# EAGLE board leer (EAGLE 6.4)
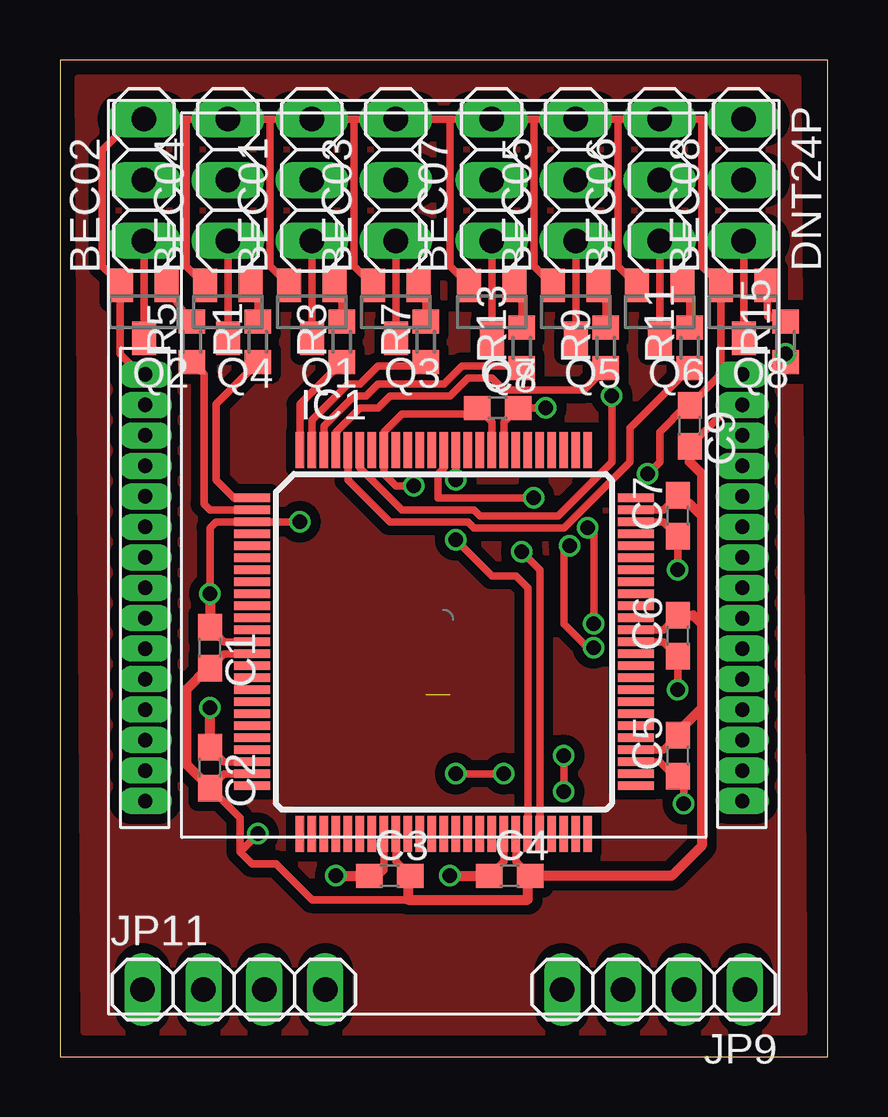
[diagram p0: board, top side]
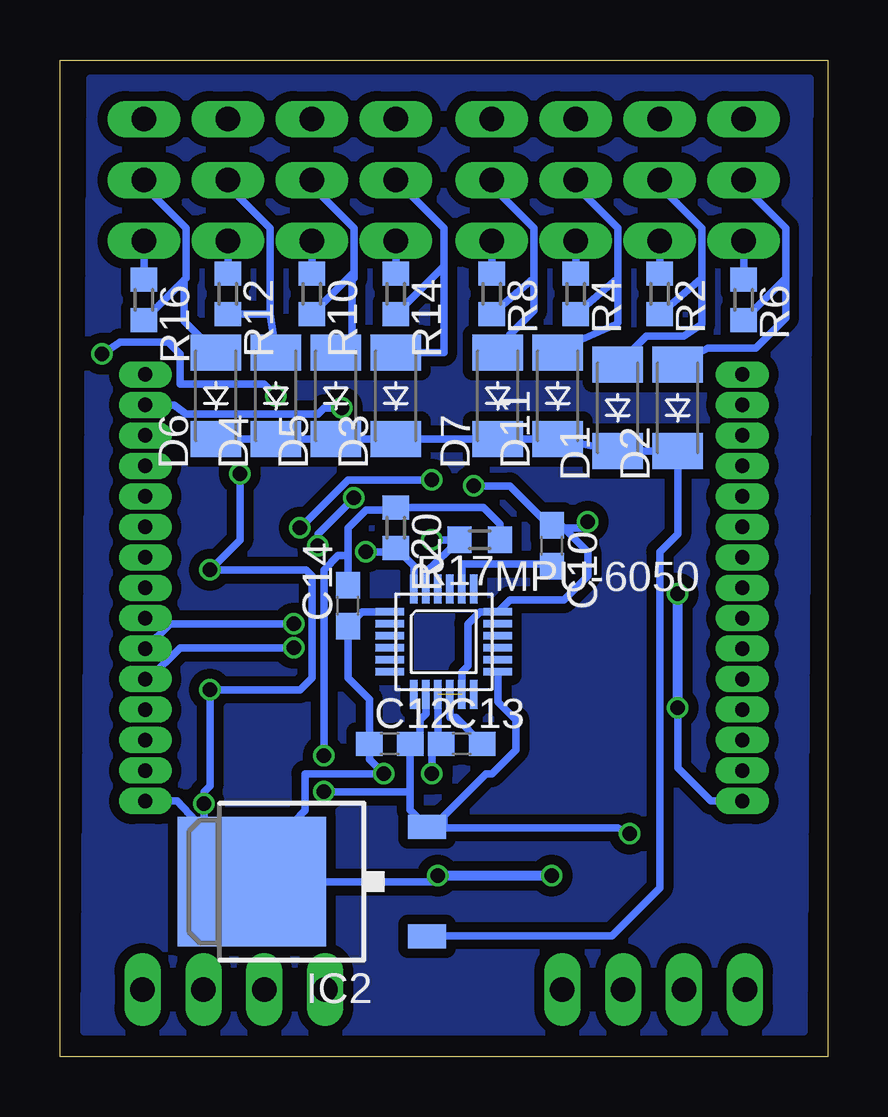
[diagram p1: board, bottom side, seen from below]

Size 32 x 41.55 mm. Coordinates in mm from the lower left corner, seen from the top.
Outline: 32,41.55 0,41.55 0,0 32,0 32,41.55
Copper layers (1*16): Top 0.035mm / dielectric 1.5mm / Bottom 0.035mm
Design rules "ITEADstudio_DRC": minimum track width 6mil, minimum drill 12mil, track to track 6mil, track to pad 6mil, pad to pad 6mil, via to via 6mil, smd to smd 0mil, copper to edge 10mil, drill to drill 10mil, minimum pad ring 10mil, minimum via ring 6mil, stop-mask expansion 2mil, vias tented up to drill 100mil, thermal gap 10mil

## Footprints (pad centres in the part's own frame; a part is rotated, then mirrored left to right if it is on the bottom)
1X03 = drill 1.016 long: 1 -2.54,0; 2 0,0; 3 2.54,0
C0603 = smd 1.1 x 1: 1 -0.85,0; 2 0.85,0
SOD-123_MINI-SMA = smd 1.5 x 2.1: A 1.8,0; C -1.8,0
TQFP100 = smd 1.5 x 0.35: 1 -8,6; 2 -8,5.5; 3 -8,5; 4 -8,4.5; 5 -8,4; 6 -8,3.5; 7 -8,3; 8 -8,2.5; 9 -8,2; 10 -8,1.5; 11 -8,1; 12 -8,0.5; 13 -8,0; 14 -8,-0.5; 15 -8,-1; 16 -8,-1.5; 17 -8,-2; 18 -8,-2.5; 19 -8,-3; 20 -8,-3.5; 21 -8,-4; 22 -8,-4.5; 23 -8,-5; 24 -8,-5.5; 25 -8,-6; 51 8,-6; 52 8,-5.5; 53 8,-5; 54 8,-4.5; 55 8,-4; 56 8,-3.5; 57 8,-3; 58 8,-2.5; 59 8,-2; 60 8,-1.5; 61 8,-1; 62 8,-0.5; 63 8,0; 64 8,0.5; 65 8,1; 66 8,1.5; 67 8,2; 68 8,2.5; 69 8,3; 70 8,3.5; 71 8,4; 72 8,4.5; 73 8,5; 74 8,5.5; 75 8,6 | smd 0.35 x 1.5: 26 -6,-8; 27 -5.5,-8; 28 -5,-8; 29 -4.5,-8; 30 -4,-8; 31 -3.5,-8; 32 -3,-8; 33 -2.5,-8; 34 -2,-8; 35 -1.5,-8; 36 -1,-8; 37 -0.5,-8; 38 0,-8; 39 0.5,-8; 40 1,-8; 41 1.5,-8; 42 2,-8; 43 2.5,-8; 44 3,-8; 45 3.5,-8; 46 4,-8; 47 4.5,-8; 48 5,-8; 49 5.5,-8; 50 6,-8; 76 6,8; 77 5.5,8; 78 5,8; 79 4.5,8; 80 4,8; 81 3.5,8; 82 3,8; 83 2.5,8; 84 2,8; 85 1.5,8; 86 1,8; 87 0.5,8; 88 0,8; 89 -0.5,8; 90 -1,8; 91 -1.5,8; 92 -2,8; 93 -2.5,8; 94 -3,8; 95 -3.5,8; 96 -4,8; 97 -4.5,8; 98 -5,8; 99 -5.5,8; 100 -6,8
TO252 = smd 1 x 1.6: 1 -2.28,-4.8; 2 2.28,-4.8 | smd 5.4 x 6.2: 3 0,2.5
1X04 = drill 1.016 long: 1 -3.81,0; 2 -1.27,0; 3 1.27,0; 4 3.81,0
SOT23 = smd 1 x 1.4: 1 -0.95,-1.1; 2 0.95,-1.1; 3 0,1.1
R0603 = smd 1 x 1.1: 1 -0.85,0; 2 0.85,0
DNT24P_RADIO_MODULE = drill 0.6 pad 0.889 long: P1 8.89,12.446; P2 7.62,12.446; P3 6.35,12.446; P4 5.08,12.446; P5 3.81,12.446; P6 2.54,12.446; P7 1.27,12.446; P8 0,12.446; P9 -1.27,12.446; P10 -2.54,12.446; P11 -3.81,12.446; P12 -5.08,12.446; P13 -6.35,12.446; P14 -7.62,12.446; P15 -8.89,12.446; P16 -8.89,-12.446; P17 -7.62,-12.446; P18 -6.35,-12.446; P19 -5.08,-12.446; P20 -3.81,-12.446; P21 -2.54,-12.446; P22 -1.27,-12.446; P23 0,-12.446; P24 1.27,-12.446; P25 2.54,-12.446; P26 3.81,-12.446; P27 5.08,-12.446; P28 6.35,-12.446; P29 7.62,-12.446; P30 8.89,-12.446
MPU-6050_ACC_GYRO = smd 1.2 x 0.3: P1 -2.25,1.25; P2 -2.25,0.75; P3 -2.25,0.25; P4 -2.25,-0.25; P5 -2.25,-0.75; P6 -2.25,-1.25; P13 2.25,-1.25; P14 2.25,-0.75; P15 2.25,-0.25; P16 2.25,0.25; P17 2.25,0.75; P18 2.25,1.25 | smd 0.3 x 1.2: P7 -1.25,-2.2; P8 -0.75,-2.2; P9 -0.25,-2.2; P10 0.25,-2.2; P11 0.75,-2.2; P12 1.25,-2.2; P19 1.25,2.2; P20 0.75,2.2; P21 0.25,2.2; P22 -0.25,2.2; P23 -0.75,2.2; P24 -1.25,2.2

## Placement (x,y rotation side)
BEC01  PCM  [1X03]  10.5,36.55 90 top
BEC02  PCM  [1X03]  3.5,36.55 90 top
BEC03  PCM  [1X03]  14,36.55 90 top
BEC04  PCM  [1X03]  7,36.55 90 top
BEC05  PCM  [1X03]  21.5,36.55 90 top
BEC06  PCM  [1X03]  25,36.55 90 top
BEC07  PCM  [1X03]  18,36.55 90 top
BEC08  PCM  [1X03]  28.5,36.55 90 top
C1  [C0603]  6.25,17.05 270 top
C2  [C0603]  6.25,12.05 270 top
C3  [C0603]  13.75,7.55 0 top
C4  [C0603]  18.75,7.55 0 top
C5  [C0603]  25.75,12.55 90 top
C6  [C0603]  25.75,17.55 90 top
C7  [C0603]  25.75,22.55 90 top
C8  [C0603]  18.25,27.05 0 top
C9  [C0603]  26.25,26.3 270 top
C10  [C0603]  11.5,21.3 270 bottom
C12  [C0603]  18.25,13.05 0 bottom
C13  [C0603]  15.25,13.05 0 bottom
C14  [C0603]  20,18.8 90 bottom
D1  B 140 F  [SOD-123_MINI-SMA]  8.75,27.05 90 bottom
D2  B 140 F  [SOD-123_MINI-SMA]  6.25,27.05 90 bottom
D3  B 140 F  [SOD-123_MINI-SMA]  18,27.55 90 bottom
D4  B 140 F  [SOD-123_MINI-SMA]  23,27.55 90 bottom
D5  B 140 F  [SOD-123_MINI-SMA]  20.5,27.55 90 bottom
D6  B 140 F  [SOD-123_MINI-SMA]  25.5,27.55 90 bottom
D7  B 140 F  [SOD-123_MINI-SMA]  13.75,27.55 90 bottom
D11  B 140 F  [SOD-123_MINI-SMA]  11.25,27.55 90 bottom
IC1  XMEGA128A1  [TQFP100]  16,17.3 0 top
IC2  7805DT  [TO252]  21.5,7.3 90 bottom
JP9  [1X04]  24.75,2.8 180 top
JP11  [1X04]  7.25,2.8 0 top
Q1  BC846BSMD  [SOT23]  10.5,31.05 180 top
Q2  BC846BSMD  [SOT23]  3.5,31.05 180 top
Q3  BC846BSMD  [SOT23]  14,31.05 180 top
Q4  BC846BSMD  [SOT23]  7,31.05 180 top
Q5  BC846BSMD  [SOT23]  21.5,31.05 180 top
Q6  BC846BSMD  [SOT23]  25,31.05 180 top
Q7  BC846BSMD  [SOT23]  18,31.05 180 top
Q8  BC846BSMD  [SOT23]  28.5,31.05 180 top
R1  [R0603]  8.25,29.8 90 top
R2  [R0603]  7,31.8 270 bottom
R3  [R0603]  11.75,29.8 90 top
R4  [R0603]  10.5,31.8 270 bottom
R5  [R0603]  5.5,29.8 90 top
R6  [R0603]  3.5,31.55 270 bottom
R7  [R0603]  15.25,29.8 90 top
R8  [R0603]  14,31.8 270 bottom
R9  [R0603]  22.75,29.55 90 top
R10  [R0603]  21.5,31.8 270 bottom
R11  [R0603]  26.25,29.55 90 top
R12  [R0603]  25,31.8 270 bottom
R13  [R0603]  19.25,29.55 90 top
R14  [R0603]  18,31.8 270 bottom
R15  [R0603]  30.25,29.8 90 top
R16  [R0603]  28.5,31.55 270 bottom
R17  [R0603]  14.5,21.55 180 bottom
R20  [R0603]  18,22.05 270 bottom
U$1  DNT24P_RADIO_MODULE  [DNT24P_RADIO_MODULE]  16,19.55 270 top
U$3  MPU-6050_ACC_GYRO  [MPU-6050_ACC_GYRO]  16,17.3 0 bottom

## Library data of the parts
BEC01-BEC08 JP9 JP11 = pinhead
C1-C10 C12-C14 = eagle-ltspice; SPICEMODEL: NONE; SPICEPREFIX: C
D1-D7 D11 = diode
IC1 = atmel; OC_FARNELL: unknown; OC_NEWARK: unknown
IC2 = linear
Q1-Q8 = transistor-npn
R1-R17 R20 = eagle-ltspice; SPICEMODEL: NONE; SPICEPREFIX: R
U$1 U$3 = USER PARTS

## Nets
+3V3: C1.2 C2.2 C3.2 C4.2 C5.2 C6.2 C7.2 C8.2 C9.2 C12.2 C14.2 IC1.14 IC1.24 IC1.34 IC1.44 IC1.54 IC1.64 IC1.74 IC1.83 IC2.2 R17.1 R20.1 U$1.P14 U$3.P8 U$3.P13
AVCC: IC1.4
AVCC1: IC1.94
GND: BEC01.3 BEC02.3 BEC03.3 BEC04.3 BEC05.3 BEC06.3 BEC07.3 BEC08.3 C1.1 C2.1 C3.1 C4.1 C5.1 C6.1 C7.1 C8.1 C9.1 C10.1 C12.1 C13.1 C14.1 IC1.3 IC1.13 IC1.23 IC1.33 IC1.43 IC1.53 IC1.63 IC1.73 IC1.84 IC1.93 IC2.3 Q1.2 Q2.2 Q3.2 Q4.2 Q5.2 Q6.2 Q7.2 Q8.2 U$1.P1 U$1.P15 U$1.P16 U$1.P30 U$3.P1 U$3.P9 U$3.P11 U$3.P18
N$1: Q4.1 R1.2
N$2: BEC01.1 Q1.3 R4.1
N$3: BEC01.2 D11.A R4.2
N$4: Q1.1 R3.2
N$5: BEC02.1 Q2.3 R6.1
N$6: BEC02.2 D2.A R6.2
N$7: Q2.1 R5.2
N$8: BEC03.1 Q3.3 R8.1
N$9: BEC03.2 D7.A R8.2
N$10: Q3.1 R7.2
N$11: BEC05.1 Q5.3 R10.1
N$12: BEC05.2 D5.A R10.2
N$13: Q5.1 R9.2
N$14: BEC04.1 Q4.3 R2.1
N$15: BEC04.2 D1.A R2.2
N$16: BEC06.1 Q6.3 R12.1
N$17: BEC06.2 D4.A R12.2
N$18: Q6.1 R11.2
N$19: BEC07.1 Q7.3 R14.1
N$20: BEC07.2 D3.A R14.2
N$21: Q7.1 R13.2
N$22: BEC08.1 Q8.3 R16.1
N$23: BEC08.2 D6.A R16.2
N$24: Q8.1 R15.2
N$25: IC1.1 R1.1
N$26: IC1.100 R3.1
N$27: IC1.97 R9.1
N$28: IC1.96 R11.1
N$29: IC1.2 R5.1
N$30: IC1.98 R13.1
N$31: IC1.99 R7.1
N$32: IC1.95 R15.1
N$33: IC1.88 U$1.P5
N$34: D1.C D2.C D3.C D4.C D5.C D6.C D7.C D11.C IC2.1
N$35: C10.2 U$3.P20
N$36: IC1.87 U$1.P6
N$37: C13.2 U$3.P10
PF0: IC1.46 R20.2 U$3.P24
PF1: IC1.45 R17.2 U$3.P23

## Tracks (layer width: path | path; a pad name or v marks a point on that pad's centre or on a via)
+3V3  (via drill 0.6)
  Top 0.305: IC1.83 18.5,26.45 C8.2 v20.25,27.05 | C7.2 25.15,22.8 IC1.74 | C6.2 25.15,17.8 IC1.64 | C5.2 25.15,12.8 IC1.54 | C4.2 19,8.15 IC1.44 | C3.2 14,8.15 IC1.34 | IC1.24 6.85,11.8 C2.2 7.5,9.95 7.5,8.55 | C1.2 6.85,16.8 IC1.14 | C9.2 27.97,27.17 U$1.P14 | v8.25,9.3 7.5,8.55 | 7.5,8.55 8,8.05 9,8.05 10.5,6.55 14.5,6.55 | v21,12.55 v21,11.05
  Top 0.406: C3.2 14.5,7.55 14.5,6.55 19.5,6.55 19.5,7.45 C4.2 25.5,7.55 26.75,8.8 26.75,14.55 | C5.2 25.75,13.55 26.75,14.55 | C6.2 26.4,18.4 26.75,18.05 | 26.75,18.05 26.75,14.55 | C7.2 25.75,23.3 26,23.05 26.25,23.05 26.62,22.68 | 26.62,22.68 26.75,22.55 26.75,18.05 | C9.2 26.25,24.8 26.75,24.3 26.75,22.8 26.62,22.68 | C1.2 6.15,16.2 5.25,15.3 5.25,12.2 C2.2
  Bottom 0.305: IC2.2 16.47,9.58 | v8.25,9.3 8.75,9.55 16,9.55 | 16,9.55 16.67,9.55 IC2.2 | U$3.P8 16.75,14.3 17,14.05 17,13.45 C12.2 17.4,11.05 | R17.1 13.65,22.2 14.35,22.9 R20.1 18.1,22.8 19.25,22.8 20,22.05 20,20.9 | C14.2 20,20.9 | 17.4,11.05 17.4,10.28 IC2.2 | 20,20.9 20.4,20.9 21,20.3 v21,12.55 | v21,11.05 17.4,11.05 | U$3.P13 13.75,14.8 13,14.05 13,12.8 14,11.8 14.25,11.8 16,10.05 16,9.55 | v20.25,27.05 21,27.05 21.25,26.8 26.75,26.8 27.25,27.17 U$1.P14
GND  (via drill 0.6)  (1 unrouted)
  Top 0.305: 5.25,39.09 BEC02.3 3.04,39.09 1.75,37.8 1.75,32.95 Q2.2 2.5,32.1 2.5,29.3 3.36,28.44 U$1.P16 | 5.25,39.09 BEC04.3 8.75,39.09 | 8.75,39.09 BEC01.3 12.25,39.09 | 12.25,39.09 BEC03.3 16.21,39.09 16.25,39.05 | BEC08.3 26.75,39.09 | 26.75,39.09 BEC06.3 23.25,39.09 | 23.25,39.09 BEC05.3 19.75,39.09 | 19.75,39.09 BEC07.3 16.29,39.09 16.25,39.05 | Q4.2 5.25,32.95 5.25,39.09 | Q1.2 8.75,32.95 8.75,39.09 | Q3.2 12.25,32.95 12.25,39.09 | Q7.2 16.25,32.95 16.25,39.05 | Q5.2 19.75,32.95 19.75,39.09 | Q6.2 23.25,32.95 23.25,39.09 | 26.75,39.09 26.75,32.95 Q8.2 27.55,28.45 27.54,28.44 | C8.1 18,26.45 IC1.84 | IC1.73 25.15,22.3 C7.1 v25.75,20.3 | IC1.63 25.15,17.3 C6.1 v25.75,15.3 | C5.1 26,11.45 26,11.3 | 26,11.3 25,12.3 IC1.53 | C4.1 18.5,8.15 IC1.43 | C3.1 13,7.45 13,7.3 13.5,7.8 IC1.33 | C2.1 6.85,12.3 IC1.23 | C1.1 6.85,17.3 IC1.13 | 27.54,28.44 C9.1 26.1,27.15 25,26.05 25,24.8 v24.5,24.3 | 27.54,28.44 U$1.P15 | C8.1 17.05,27.4 | C8.1 17.15,26.8 14.25,26.8 13.5,26.05 IC1.93 13.5,24.3 14,23.8 v14.75,23.8 | v6.25,19.3 6.25,22.05 6.5,22.3 IC1.3 v10,22.3 | 26,11.3 v26,10.55 | v18.5,11.8 v16.5,11.8
  Top 0.406: C2.1 v6.25,14.55 | v6.25,19.3 C1.1 | v16.25,7.55 C4.1 | v11.5,7.55 C3.1
  Bottom 0.305: U$1.P1 27.11,10.66 25.8,9.24 | 25.8,9.24 IC2.3 | v26,10.55 26,9.55 24.37,7.72 | 24.37,7.72 IC2.3 | 25.8,9.24 26,9.44 26,11.05 25.75,11.3 v25.75,15.3 22,15.3 21.5,15.8 21.5,20.05 21.75,20.3 v25.75,20.3 24.5,21.55 v24.5,24.3 | U$1.P30 4.86,10.66 6.25,12.05 6.25,15.05 | v14.75,23.8 13.25,23.8 11.6,22.15 C10.1 11.1,22.15 11,22.05 | v10,22.3 10.25,22.05 11,22.05 | IC2.3 16.5,7.3 v16.25,7.55 | U$3.P1 19.4,18.55 C14.1 20,15.8 19.1,14.9 C12.1 19.1,12.4 v18.5,11.8 21.79,11.8 21.79,10.26 22.25,9.8 24.37,7.72 | v16.5,11.8 16.5,12.65 C13.1 16.25,13.2 U$3.P9 | 11,22.05 10,21.05 10,20.05 11,19.05 13.25,19.05 U$3.P18 14.5,18.55 15,18.05 15,16.3 15.25,16.05 U$3.P11
  Bottom 0.406: v6.25,14.55 6.25,15.05 v6.25,19.3 | v11.5,7.55 v16.25,7.55
GNDS
  pour Bottom (isolate 0.406): 0.75,40.8 30.75,40.8 31,1.05 1,1.05
  pour Top (isolate 0.406): 0.75,40.8 30.75,40.8 31,1.05 1,1.05
N$1
  Top 0.305: R1.2 8.25,31.85 Q4.1
N$2
  Top 0.305: Q1.3 BEC01.1
  Bottom 0.305: R4.1 BEC01.1
N$3
  Bottom 0.305: R4.2 8.75,32.45 | 8.75,32.45 8.75,34.55 10.5,36.3 BEC01.2 | D11.A 10.5,29.8 8.8,30.55 8.75,30.6 8.75,32.45
N$4
  Top 0.305: R3.2 11.75,31.85 Q1.1
N$5
  Top 0.305: Q2.3 BEC02.1
  Bottom 0.305: R6.1 BEC02.1
N$6
  Bottom 0.305: R6.2 1.75,32.45 | 1.75,32.45 1.75,34.55 3.5,36.3 BEC02.2 | D2.A 5,29.55 3,29.55 1.75,30.8 1.75,32.45
N$7
  Top 0.305: R5.2 4.45,31.95 Q2.1
N$8
  Top 0.305: Q3.3 BEC03.1
  Bottom 0.305: R8.1 BEC03.1
N$9
  Bottom 0.305: R8.2 12.25,32.45 | 12.25,32.45 12.25,34.55 14,36.3 BEC03.2 | D7.A 13.25,30.1 12.25,31.1 12.25,32.45
N$10
  Top 0.305: R7.2 15.25,31.6 Q3.1
N$11
  Top 0.305: Q5.3 BEC05.1
  Bottom 0.305: R10.1 BEC05.1
N$12
  Bottom 0.305: R10.2 19.82,32.62 | 19.82,32.62 19.75,32.45 19.75,34.55 21.5,36.3 BEC05.2 | D5.A 19.82,29.53 19.82,32.62
N$13
  Top 0.305: R9.2 22.75,31.85 Q5.1
N$14
  Top 0.305: Q4.3 BEC04.1
  Bottom 0.305: R2.1 BEC04.1
N$15
  Bottom 0.305: R2.2 5.25,32.45 | 5.25,32.45 5.25,34.55 7,36.3 BEC04.2 | 5.25,32.45 5.25,30.55 6,30.05 7.55,30.05 D1.A
N$16
  Top 0.305: Q6.3 BEC06.1
  Bottom 0.305: R12.1 BEC06.1
N$17
  Bottom 0.305: R12.2 23.25,30.95 | 23.25,30.95 23.25,34.55 25,36.3 BEC06.2 | D4.A 23.25,30.95
N$18
  Top 0.305: R11.2 26.25,31.85 Q6.1
N$19
  Top 0.305: Q7.3 BEC07.1
  Bottom 0.305: R14.1 BEC07.1
N$20
  Bottom 0.305: R14.2 16,32.95 | 16,32.95 16,34.55 BEC07.2 | D3.A 16,29.35 16,32.95
N$21
  Top 0.305: R13.2 19.25,31.85 Q7.1
N$22
  Top 0.305: Q8.3 BEC08.1
  Bottom 0.305: R16.1 BEC08.1
N$23
  Bottom 0.305: R16.2 26.82,32.38 | 26.82,32.38 26.75,32.45 26.75,34.55 28.5,36.3 BEC08.2 | D6.A 26.82,30.68 26.82,32.38
N$24
  Top 0.305: R15.2 29.5,30.85 Q8.1
N$25
  Top 0.305: R1.1 6.5,27.2 6.5,24.05 7.25,23.3 IC1.1
N$26
  Top 0.305: R3.1 10,27.2 IC1.100
N$27
  Top 0.305: R9.1 21.85,27.8 18.5,27.8 18,28.3 17,28.3 16.25,27.55 13.75,27.55 13.25,27.05 12.5,27.05 11.5,26.05 IC1.97
N$28
  Top 0.305: IC1.96 12,24.05 13.75,22.3 17,22.3 17.25,22.05 21,22.05 23.75,24.8 23.75,26.2 R11.1 26.1,28.55
N$29
  Top 0.305: R5.1 6,28.45 6,23.05 6.25,22.8 IC1.2
N$30
  Top 0.305: R13.1 19.15,28.8 16.75,28.8 16,28.05 13.25,28.05 12.75,27.55 12.25,27.55 11,26.3 IC1.98
N$31
  Top 0.305: IC1.99 10.5,26.55 12,28.05 12.5,28.05 13.25,28.8 15.1,28.8 R7.1
N$32  (via drill 0.6)
  Top 0.305: R15.1 30,28.7 v30.25,29.3 | v23,27.55 23,24.8 20.75,22.55 17.5,22.55 17.25,22.8 14.25,22.8 12.5,24.55 IC1.95
  Bottom 0.305: v30.25,29.3 29.5,29.8 27.5,29.8 27,29.3 27,28.05 23.5,28.05 v23,27.55
N$33  (via drill 0.6)
  Top 0.305: IC1.88 16,24.55 15.75,24.3 15.75,23.3 v19.75,23.3 | v22.25,17.05 22,17.05 21,18.05 21,21.05 v21.25,21.3
  Bottom 0.305: U$1.P5 28.31,15.74 27,17.05 v22.25,17.05 | v21.25,21.3 21.25,21.8 v19.75,23.3
N$34
  Bottom 0.305: D6.C D4.C D5.C D3.C D7.C D11.C D1.C D2.C 6.25,21.8 7,21.05 7,7.05 9,5.05 16.67,5.05 IC2.1
N$35
  Bottom 0.305: U$3.P20 15.25,20.55 11.75,20.55 | 11.5,20.4 11.75,20.55 | 11.75,20.55 C10.2
N$36  (via drill 0.6)
  Top 0.305: IC1.87 v16.5,24.05 | v22,22.05 22.25,21.8 v22.25,18.05
  Bottom 0.305: v16.5,24.05 20,24.05 v22,22.05 | v22.25,18.05 27.41,18.05 U$1.P6
N$37
  Bottom 0.305: U$3.P10 15.75,14.15 15.5,14.15 C13.2
PF0  (via drill 0.6)
  Top 0.305: IC1.46 20,20.3 v19.25,21.05
  Bottom 0.305: U$3.P24 17.25,20.45 R20.2 18.15,21.05 v19.25,21.05
PF1  (via drill 0.6)
  Top 0.305: IC1.45 19.5,19.55 19,20.05 18,20.05 v16.5,21.55
  Bottom 0.305: U$3.P23 16.75,20.2 R17.2 v16.5,21.55